# Altium PCB Color_V1.0.PcbDoc
Units mm, origin at the board's own origin, x right, y up, seen from the top; angles counter-clockwise.
Board outline 55 x 55 mm, 2 copper layers (Top Layer, Bottom Layer), stack 0.96 mm thick; 49 components, 31 nets, 199 pads, 37 vias.
Unrouted connection lines stored in the file: 65.
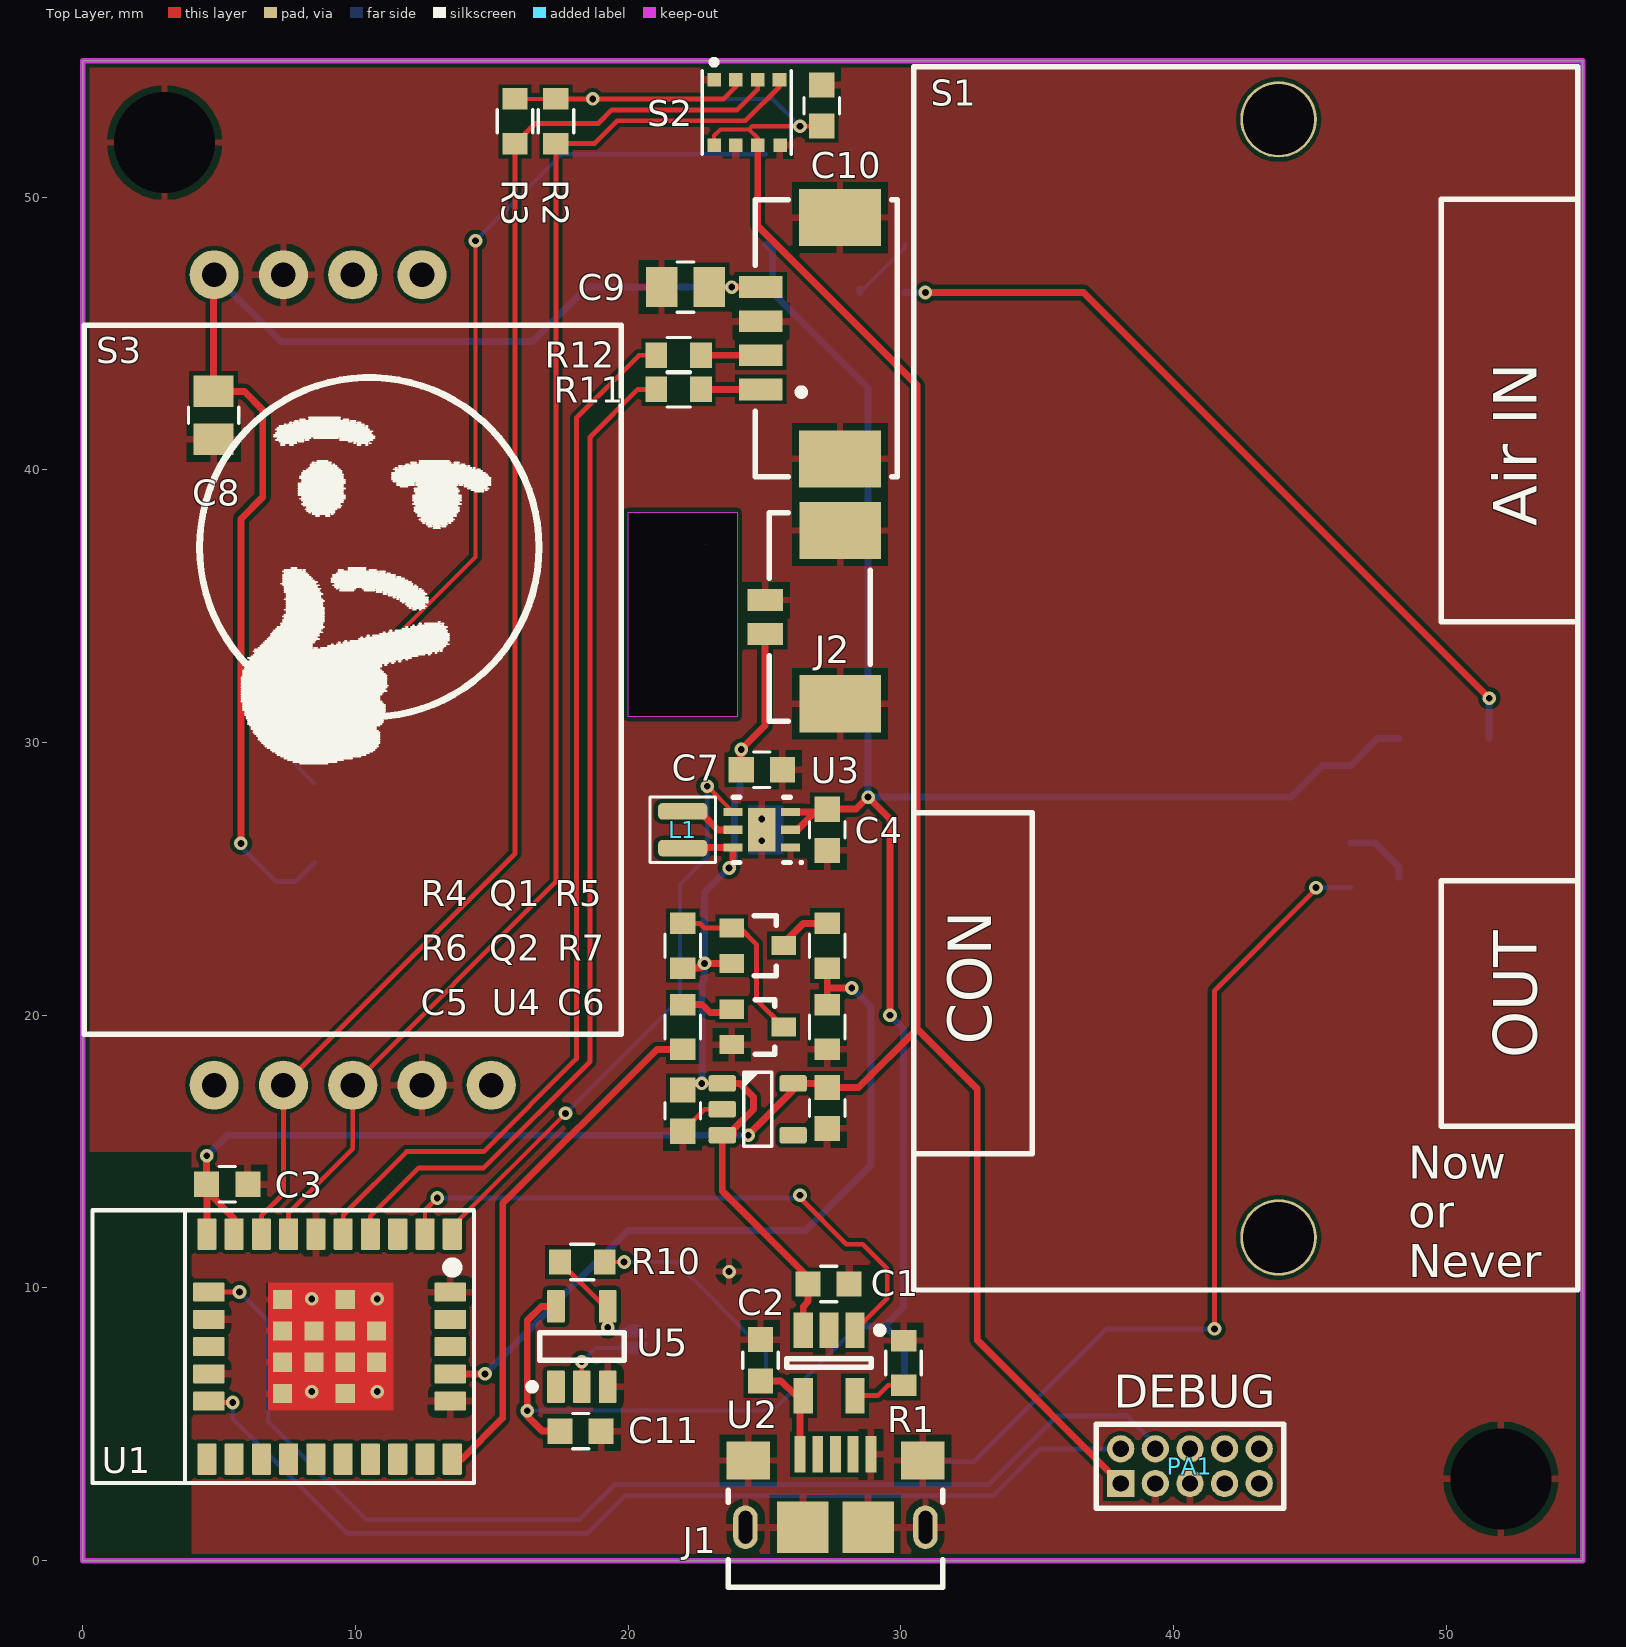
[diagram p0: Top Layer view]
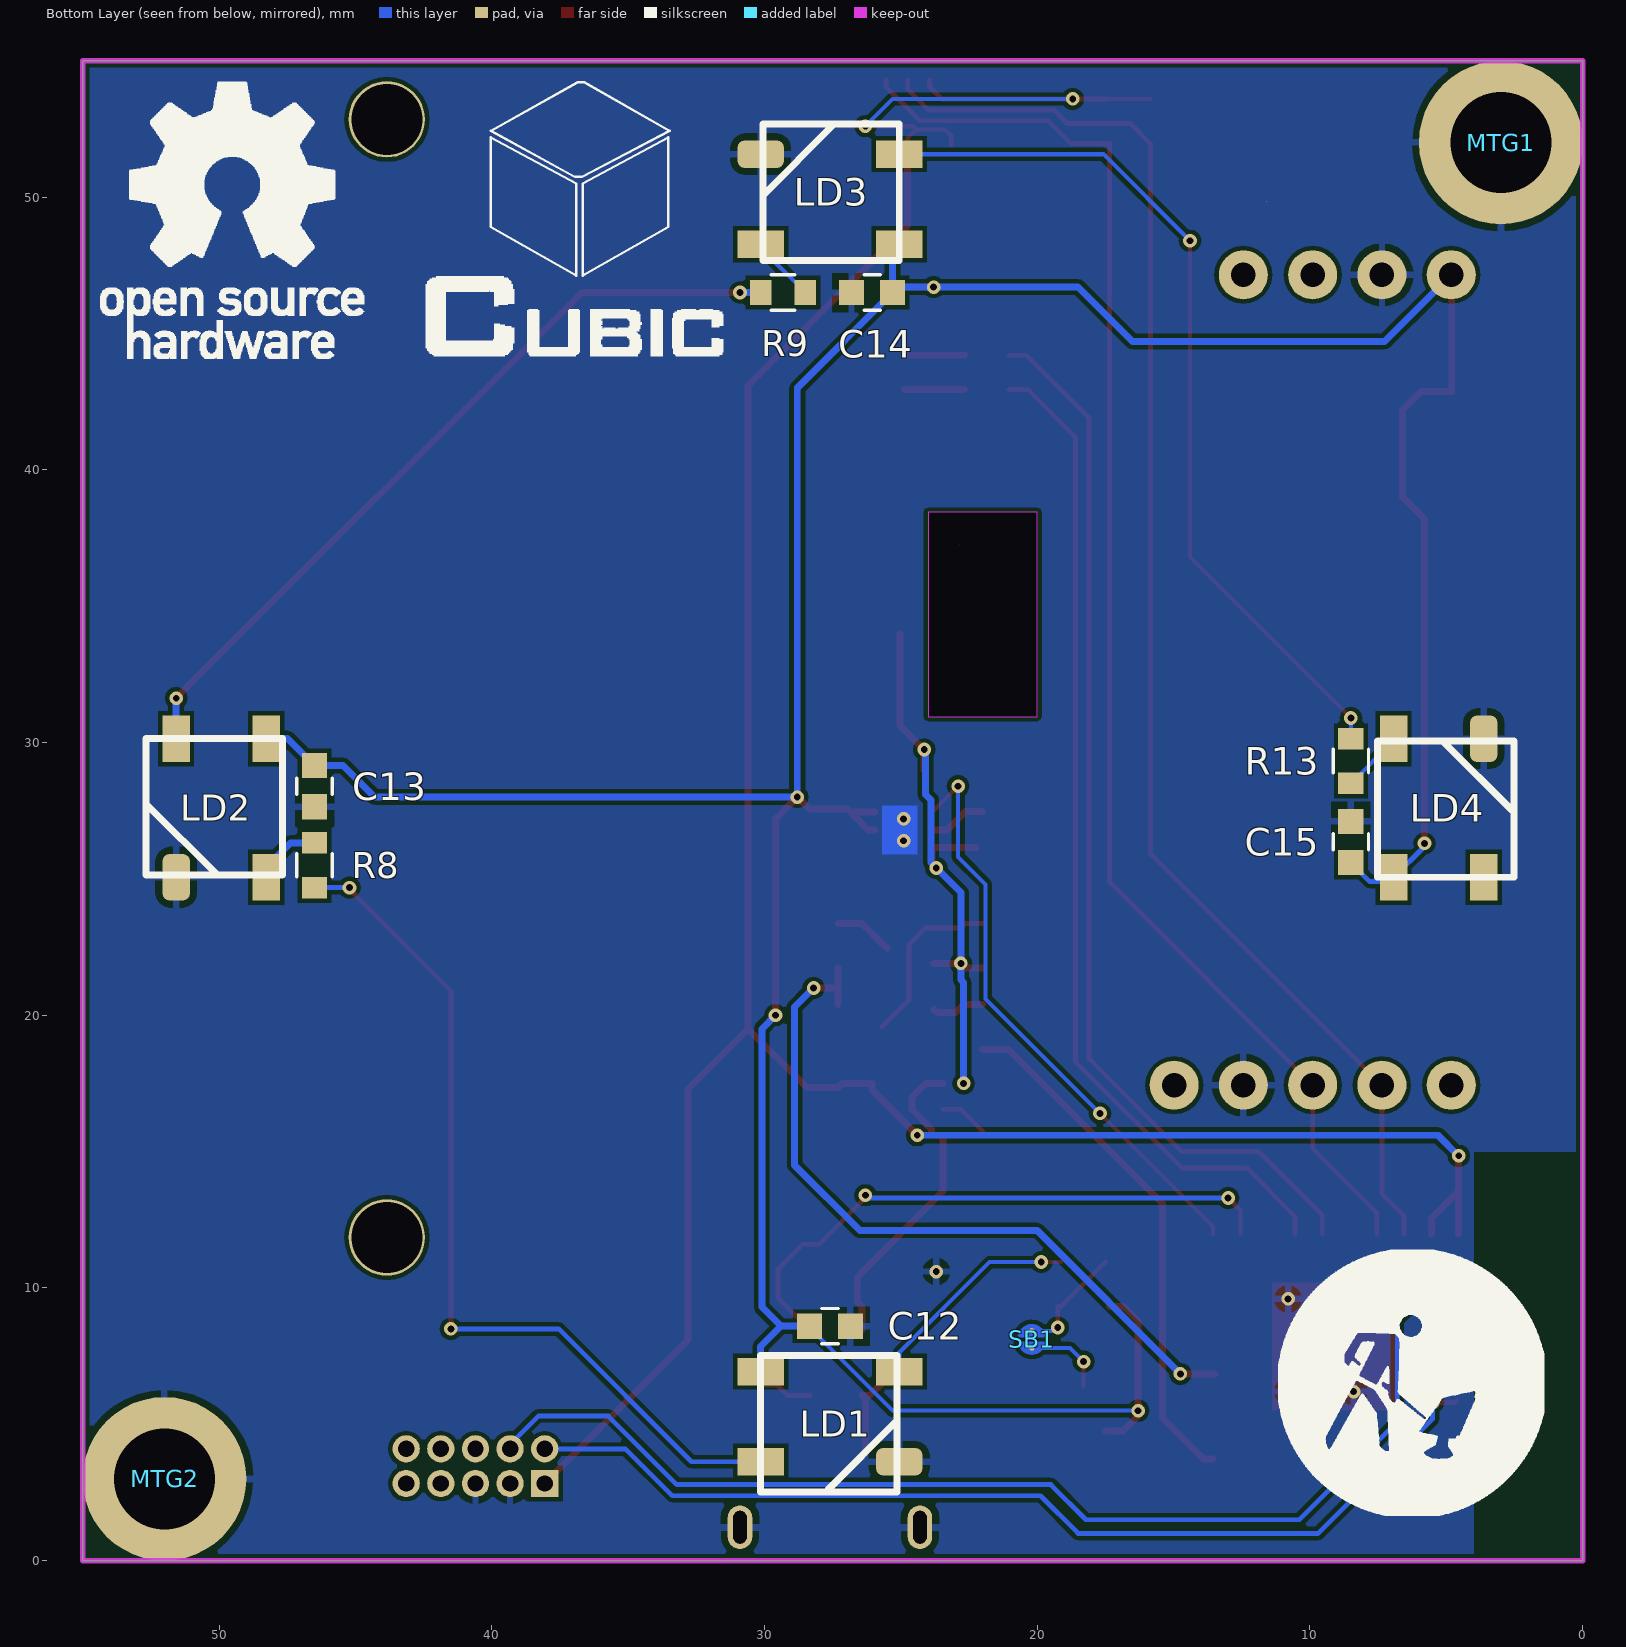
[diagram p1: Bottom Layer view, seen from below]
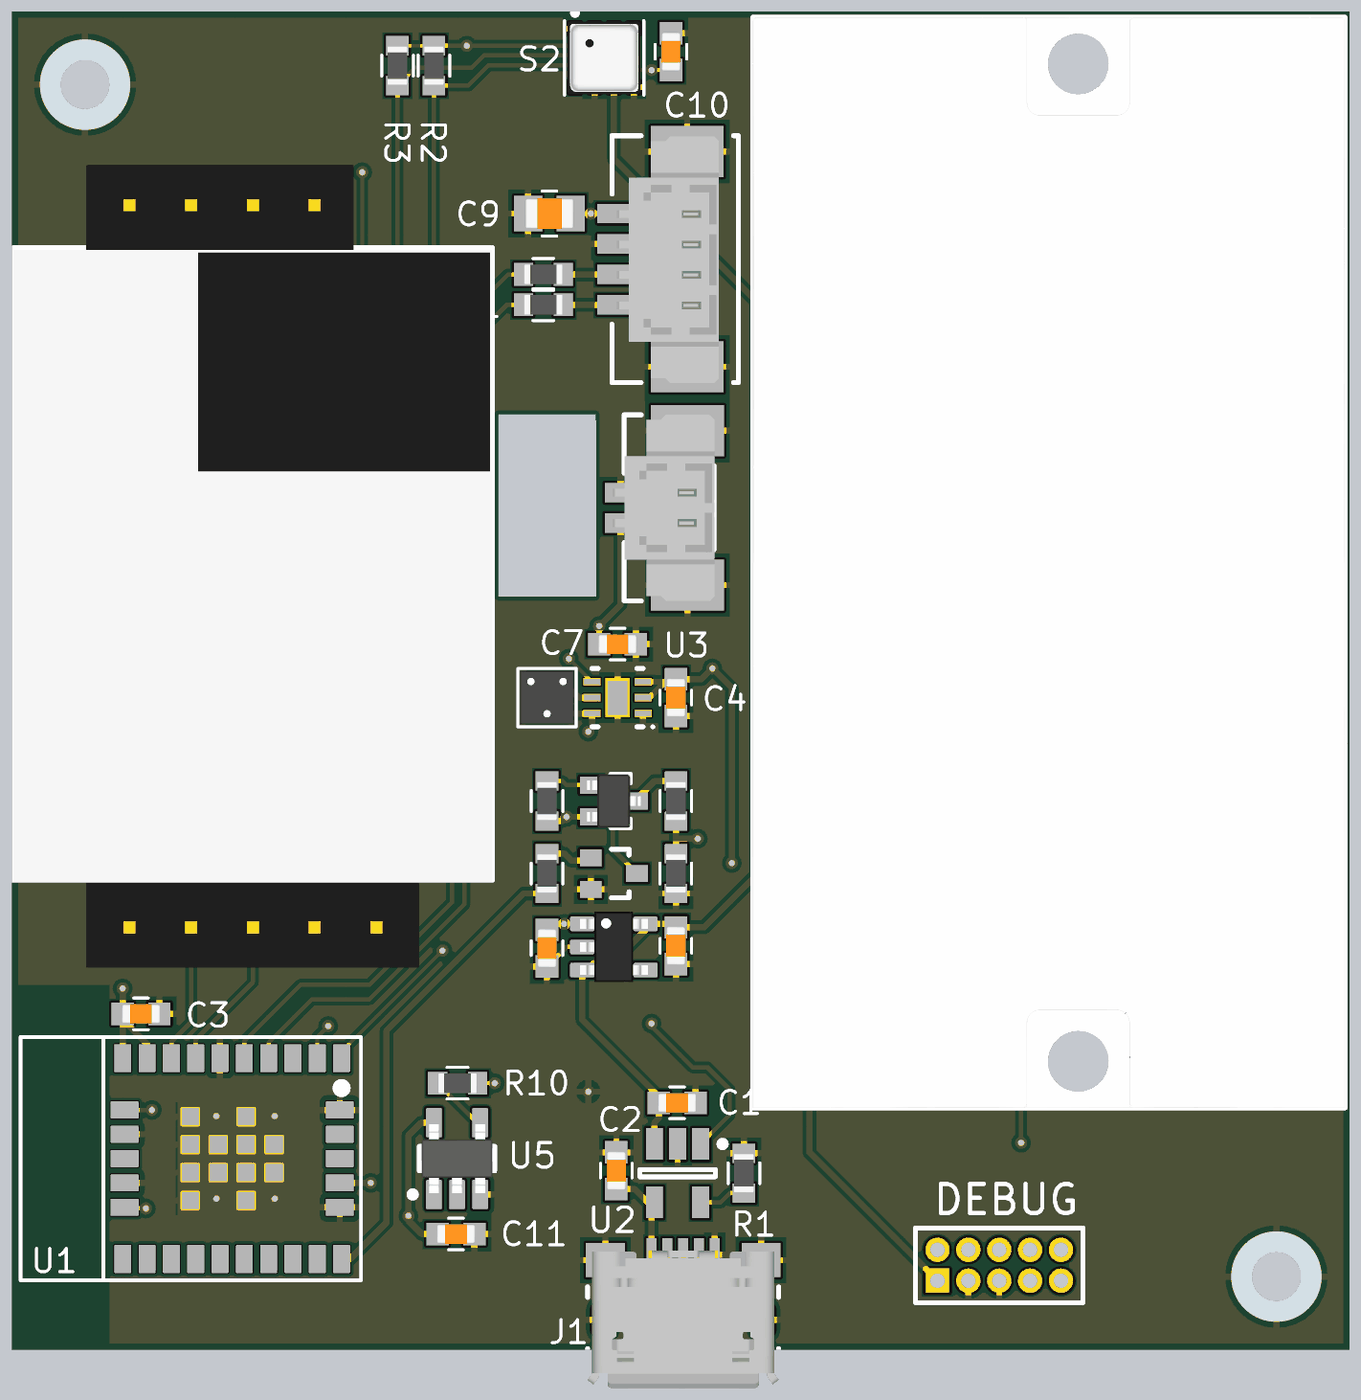
[diagram p2: 3D render of the assembled board from above, using the file's embedded part models]
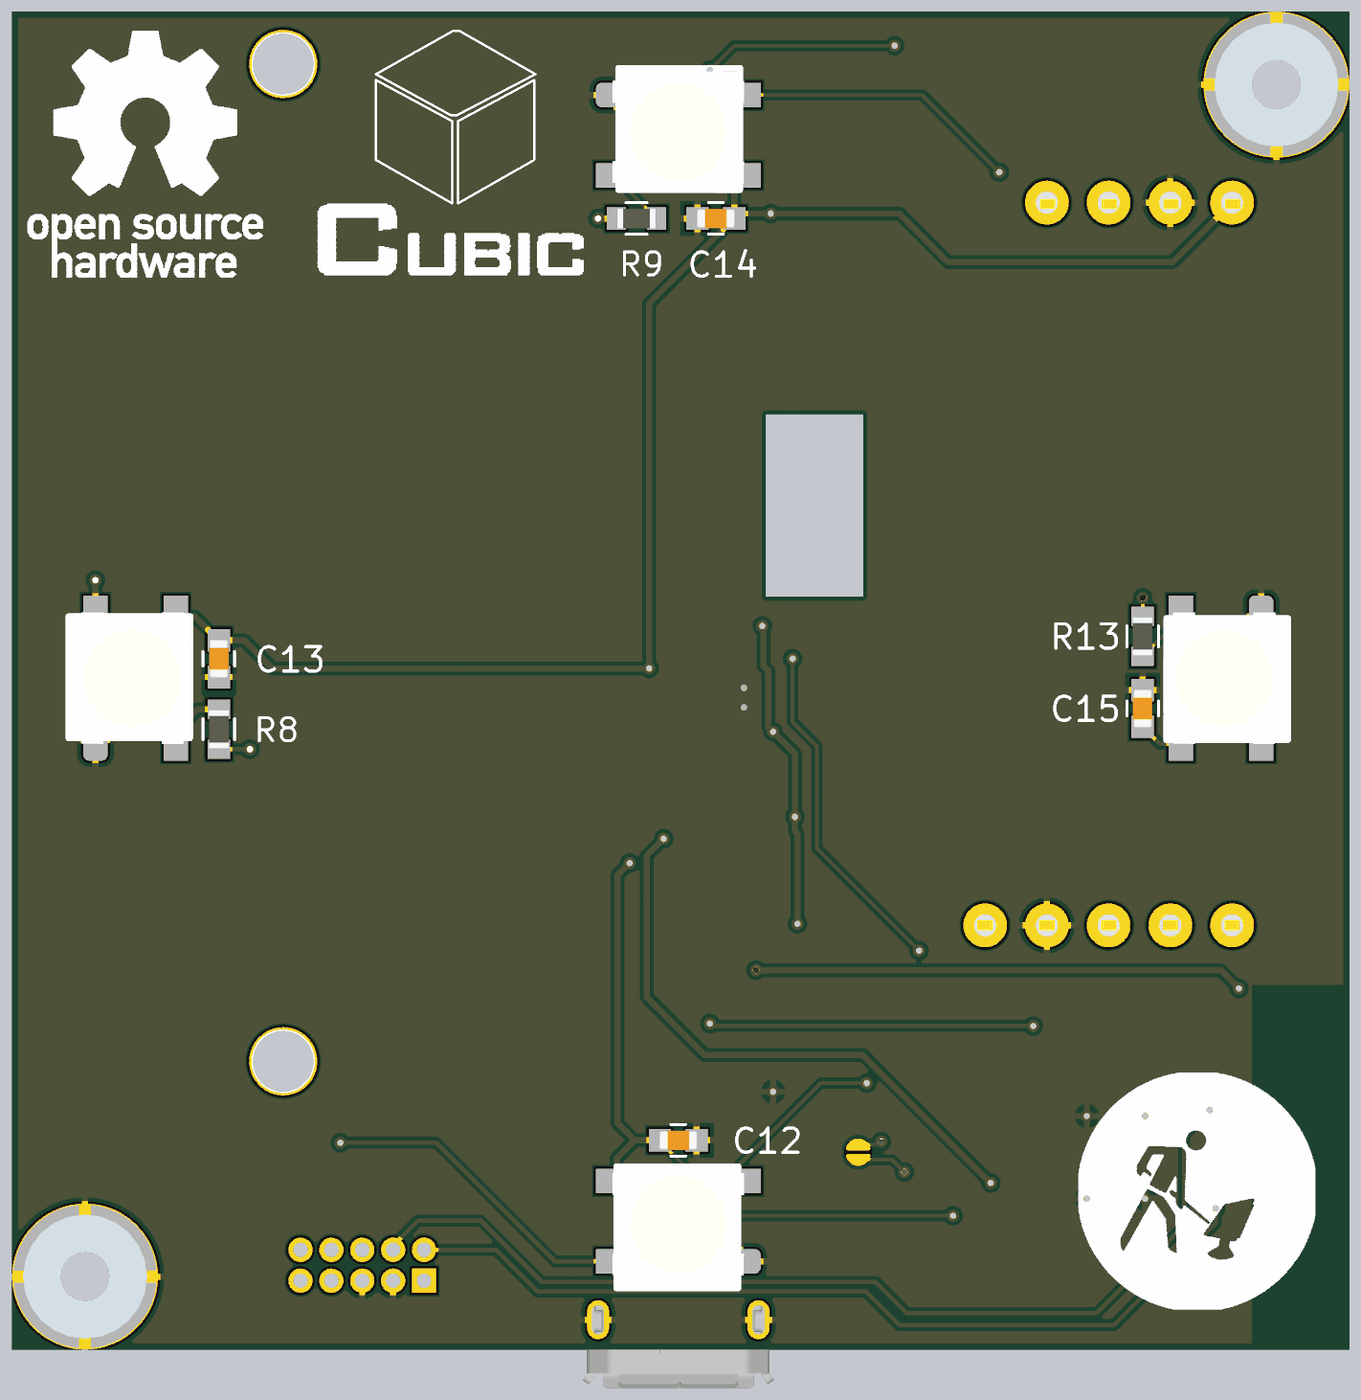
[diagram p3: 3D render of the assembled board from below, using the file's embedded part models]

## Layer stack, top to bottom
Top Solder: solder mask 0.01, Solder Resist, Dk 3.5
Top Layer: signal copper 0.03
Dielectric 1: dielectric 0.9, FR-4, Dk 4.8
Bottom Layer: signal copper 0.03
Bottom Solder: solder mask 0.1, Solder Resist, Dk 3.5

## Board outline
0,0 0,55 55,55 55,0
cut-out: 24,30.95 20,30.95 20,38.45 24,38.45
cut-out: 22.85,37.25
cut-out: 22.85,37.25
cut-out: 11.6,49.85

## Design rules (kind name [scope] priority, off if disabled: settings)
BoardOutlineClearance [All] p1: gap=0 ignorepadtopadclearanceinfootprint=FALSE
Clearance [All] p1: gap=0.152 ignorepadtopadclearanceinfootprint=FALSE
ComponentClearance [All] p1: gap=0 collisioncheckmode=3 verticalgap=0 showdistances=FALSE
DiffPairsRouting [All] p1: maxlimit=0.203 minlimit=0.203 mostfreqgap=0.203 toplayer_minwidth=0.152 toplayer_maxwidth=0.152 toplayer_prefwidth=0.152 bottomlayer_minwidth=0.152 bottomlayer_maxwidth=0.152 bottomlayer_prefwidth=0.152 maxuncoupledlength=12.7
HoleSize [All] p1: absolutevalues=TRUE maxlimit=5 minlimit=0.025 maxpercent=80.000 minpercent=20.000
HoleToHoleClearance [All] p1: gap=0.12 allowstackedmicrovias=TRUE
MinimumSolderMaskSliver [All] p1: minsoldermaskwidth=0
PolygonConnect Main [All] p1: connectstyle=Relief reliefconductorwidth=0.25 reliefentries=4 polygonreliefangle="90 Angle" airgapwidth=0.25
PolygonConnect MTG [HasFootprint('9774030151')] p2: connectstyle=Direct reliefconductorwidth=0.254 reliefentries=4 polygonreliefangle="90 Angle" airgapwidth=0.254
RoutingVias [All] p1: holewidth=0.25 width=0.5 viastyle="Through Hole" minholewidth=0.25 minwidth=0.5 maxholewidth=0.25 maxwidth=0.5
SilkToSilkClearance [All] p1: silktosilkclearance=0
SilkToSolderMaskClearance [IsPad] p1: minsilkscreentomaskgap=0 clearancetoexposedcopper=TRUE
SolderMaskExpansion [All] p1: expansion=0.102
Width [All] p1: maxlimit=0.254 minlimit=0.152 preferedwidth=0.178
23 further rules are at their usual default settings.

## Components (designator, comment, footprint, x,y, rotation, side; value= is the part's Value field where it differs from the comment)
C1 "Cap" CAPC1608X90N_2 27.35,10.143 r180 top value="6.3V 1uF"
C2 "Cap" CAPC1608X90N_2 24.85,7.35 r90 top value="10V 1uF"
C3 "Cap" CAPC1608X90N_2 5.3,13.8 r180 top value="4V 4.7uF"
C4 "Cap" CAPC1608X90N_2 27.3,26.8 r90 top value="10V 10uF"
C5 "Cap" CAPC1608X90N_2 22,16.5 r90 top value="6.3V 1uF"
C6 "Cap" CAPC1608X90N_2 27.3,16.6 r270 top value="4V 2.2uF"
C7 "Cap" CAPC1608X90N_2 24.9,29 r180 top value="6.3V 10uF"
C8 "6.3V 10uF" CAPC2012X145N 4.8,42 r90 top value=100pF
C9 "Cap" CAPC2012X145N 22.1,46.7 r0 top value="6.3V 10uF"
C10 "Cap" CAPC1608X90N_2 27.1,53.355 r90 top value="6.3V 1uF"
C11 "Cap" CAPC1608X90N_2 18.255,4.75 r0 top value=100nF
C12 "Cap" CAPC1608X90N_2 27.6,8.6 r0 bottom value=0.1uF
C13 "Cap" CAPC1608X90N_2 46.5,28.4 r90 bottom value=0.1uF
C14 "Cap" CAPC1608X90N_2 26.055,46.5 r180 bottom value=0.1uF
C15 "Cap" CAPC1608X90N_2 8.5,26.355 r270 bottom value=0.1uF
J1 "10118193-0001LF" FCI-10118193-0001LF-5_V 27.6,2.575 r0 top
J2 "53398-0271" MOLX-53398-0271_V 26.4,34.6 r90 top
L1 "EPL2010-152" EPL2010 22,26.8 r90 top value=EPL2010
LD1 "SK6812" WS2812B 27.6,5.1 r180 bottom
LD2 "SK6812" WS2812B 50.1,27.6 r270 bottom
LD3 "SK6812" WS2812B 27.6,50.1 r0 bottom
LD4 "SK6812" WS2812B 5.1,27.6 r90 bottom
MTG1 "M2.5" 9774030151 3,52 r180 bottom
MTG2 "M2.5" 9774030151 52,3 r180 bottom
PA1 "JTAG" MHDR2X5 38.06,2.83 r0 top
Q1 "DMG1013" DIOD-SOT323-3_V 24.75,22.55 r0 top
Q2 "MMBT2222" ONSC-SC-70-3-419-04_V 24.75,19.57 r0 top
R1 "Res1" RESC1608X55N_2 30.1,7.25 r270 top value=3.5K
R2 "Res1" RESC1608X55N_2 17.35,52.78 r90 top value=4K7
R3 "Res1" RESC1608X55N_2 15.85,52.78 r90 top value=4K7
R4 "Res1" RESC1608X55N_2 22,22.55 r270 top value=10K
R5 "Res1" RESC1608X55N_2 27.3,22.55 r90 top value=1M
R6 "Res1" RESC1608X55N_2 22,19.57 r90 top value=10K
R7 "Res1" RESC1608X55N_2 27.3,19.57 r90 top value=111K
R8 "Res1" RESC1608X55N_2 46.5,25.5 r270 bottom value=330
R9 "Res1" RESC1608X55N_2 29.32,46.5 r0 bottom value=330
R10 "Res1" RESC1608X55N_2 18.32,10.95 r180 top value=330
R11 "Res1" RESC1608X55N_2 21.85,42.95 r0 top value=330
R12 "Res1" RESC1608X55N_2 21.85,44.2 r0 top value=330
R13 "Res1" RESC1608X55N_2 8.5,29.32 r90 bottom value=330
S1 "PM2006" PM2006 42.643,32.35 r90 top locked
S2 "BME680" BME680 24.35,53.1 r180 top
S3 "CM1106" CM1106 9.9,31.9 r90 top
SB1 "Solderbridge" Solderbridge 20.2,8.425 r270 bottom
U1 "NINA-B112" NINA-B1 7.35,7.85 r180 top value=NINA-B1
U2 "MCP73831" SOT-23-OT5_M 27.371,7.25 r270 top
U3 "TPS61240DRVR" DRV6-1600X1000TP 24.9,26.8 r180 top
U4 "TLV741P" SOT23-5 24.75,16.55 r0 top
U5 "SN74LV1T34" DBV0005A_M 18.3,7.85 r90 top

## Footprints (in the part's own frame and the unit in brackets; to place one, negate y for a bottom-side part, rotate by r counter-clockwise, add the part's x,y. Pads: shape width x height; smd on the part's side, far side on the other; paste and mask are expansions set on the pad)
9774030151 [mm] "M2.5 Thread Internal, Length 3mm"
  round 6 / inner round 0 / far side round 0 hole 3.7 paste-403.566: 1(0,0)
  body extent -2.55,-2.55 2.55,2.55, height 3.01
BME680 [mm]
  rect 0.5x0.5 smd: 1(1.2,-1.2) 2(0.4,-1.2) 3(-0.4,-1.2) 4(-1.2,-1.2) 5(-1.22,1.2) 6(-0.4,1.2) 7(0.4,1.2) 8(1.2,1.2)
  silkscreen extent -1.63,-1.95 1.63,1.53, body extent -1.5,-1.5 1.5,1.5, height 0.95
CAPC1608X90N_2 [mm]
  rect 0.92x0.93 smd: 1(-0.755,0) 2(0.755,0)
  Top Layer pour cut-out: -0.381,-0.635 0.381,-0.635 0.381,0.635 -0.381,0.635
  silkscreen extent -0.3,-0.65 0.3,0.65, body extent -0.8,-0.4 0.8,0.4, height 0.9
CAPC2012X145N [mm]
  rect 1.16x1.47 smd: 1(-0.875,0) 2(0.875,0)
  Top Layer pour cut-out: -0.381,-0.889 0.381,-0.889 0.381,0.889 -0.381,0.889
  silkscreen extent -0.3,-0.92 0.3,0.92, body extent -1,-0.63 1,0.63, height 1.45
CM1106 [mm]
  round 1.8 hole 0.9: L1(-14.463,5.08) L2(-14.463,2.54) L3(-14.463,0) L4(-14.463,-2.54) L5(-14.463,-5.08) R1(15.25,5.08) R2(15.25,2.54) R3(15.25,0) R4(15.25,-2.54)
  silkscreen extent -12.6,-9.85 13.4,9.85, body extent -16.2,-9.85 16.8,9.85, height 18.1
DBV0005A_M [mm] "SOT23, 5-Leads, Body 3.05x1.75mm, Pitch 0.95mm, IPC Low Density"
  rrect15% 1.2x0.65 smd: 1(-1.475,0.95) 2(-1.475,0) 3(-1.475,-0.95) 4(1.475,-0.95) 5(1.475,0.95)
  silkscreen extent -1.6,-1.55 0.5,1.95, body extent -1.42,-1.46 1.42,1.46, height 1.08
DIOD-SOT323-3_V [mm] "SOT323, 3-Leads, Body 2.2x1.35mm, Pitch 0.65mm"
  rect 0.9x0.7 smd: 1(-0.95,0.65) 2(-0.95,-0.65) 3(0.95,0)
  silkscreen extent -0.13,-1.1 0.67,1.1, body extent -1.1,-1.1 1.1,1.1, height 1.07
DRV6-1600X1000TP [mm] "SON, 6-Leads, Body 2x2mm, Pitch 0.65mm, Thermal Pad 1.6x1mm, TI Recommended"
  rect 0.7x0.3 smd paste-0.025 mask+0.07: 1(-1.05,0.65) 2(-1.05,0) 3(-1.05,-0.65) 4(1.05,-0.65) 5(1.05,0) 6(1.05,0.65)
  rect 1x1.6 smd paste-0.5 mask+0.07: 7(0,0)
  silkscreen extent -1.5,-1.2 1.05,1.25, body extent -1.05,-1.05 1.05,1.05, height 0.8
EPL2010 [mm]
  rrect50% 0.6x1.8 smd: 1(-0.675,0) 2(0.675,0)
  silkscreen extent -1.2,-1.2 1.2,1.2, body extent -1.1,-1.1 1.1,1.1, height 1.05
FCI-10118193-0001LF-5_V [mm] "Micro, USB-B, 5-Leads, Body 7.86x5.05mm, Pitch 0.65 mm"
  rect 0.4x1.35 smd: 1(-1.3,1.325) 2(-0.65,1.325) 3(0,1.325) 4(0.65,1.325) 5(1.3,1.325)
  rect 1.6x1.4 smd: 6(-3.2,1.1) 7(3.2,1.1)
  rect 1.9x1.9 smd: 8(-1.2,-1.35) 9(1.2,-1.35)
  oval 0.9x1.6 hole 0.5 slot 1.2 at 90 deg: 10(-3.3,-1.35) 11(3.3,-1.35)
  silkscreen extent -3.93,-3.55 3.93,0, body extent -3.93,-4.16 3.93,1.5, height 2.83
MHDR2X5 [mm] "Connector; Header; 5x2 Position"
  rect 1x1 hole 0.6: 1(0,0)
  round 1 hole 0.6: 2(0,1.27) 3(1.27,0) 4(1.27,1.27) 5(2.54,0) 6(2.54,1.27) 7(3.81,0) 8(3.81,1.27) 9(5.08,0) 10(5.08,1.27)
  silkscreen extent -0.9,-0.9 5.98,2.17
MOLX-53398-0271_V [mm] "Header, 2-Leads, Body 7.65x3.7mm, Pitch 1.25mm"
  rect 0.8x1.3 smd: 1(-0.625,1.375) 2(0.625,1.375)
  rect 2.1x3 smd: MP1(-3.175,-1.375) MP2(3.175,-1.375)
  silkscreen extent -3.82,-2.47 3.83,1.22, body extent -3.82,-2.49 3.83,1.71, height 4.72
NINA-B1 [mm] "Stand-alone Bluetooth low energy module"
  rrect10% 0.7x1.15 smd paste+0 mask+0.05: 1(-6.2,-4.125) 2(-5.2,-4.125) 3(-4.2,-4.125) 4(-3.2,-4.125) 5(-2.2,-4.125) 6(-1.2,-4.125) 7(-0.2,-4.125) 8(0.8,-4.125) 9(1.8,-4.125) 10(2.8,-4.125) 16(2.8,4.125) 17(1.8,4.125) 18(0.8,4.125) 19(-0.2,4.125) 20(-1.2,4.125) 21(-2.2,4.125) 22(-3.2,4.125) 23(-4.2,4.125) 24(-5.2,4.125) 25(-6.2,4.125)
  rrect10% 1.15x0.7 smd paste+0 mask+0.05: 11(2.725,-2) 12(2.725,-1) 13(2.725,0) 14(2.725,1) 15(2.725,2) 26(-6.125,2) 27(-6.125,1) 28(-6.125,0) 29(-6.125,-1) 30(-6.125,-2)
  rect 0.7x0.7 smd paste+0 mask+0.05: G(-3.425,-0.575) G(-3.425,0.575) G(-2.275,1.725) G(-2.275,-0.575) G(-2.275,0.575) G(-2.275,-1.725) G(-1.125,-0.575) G(-1.125,0.575) G(0.025,1.725) G(0.025,0.575) G(0.025,-0.575) G(0.025,-1.725)
  Top Layer pour cut-out: 3.6,-5 7,-5 7,5 3.6,5
  Bottom Layer pour cut-out: 3.6,-5 7,-5 7,5 3.6,5
  silkscreen extent -7,-5 7,5, body extent -7,-5 7,5, height 4.1
ONSC-SC-70-3-419-04_V [mm] "SOT23, 3-Leads, Body 2x1.25mm, Pitch 0.65mm"
  rect 0.9x0.7 smd: 1(-0.95,0.65) 2(-0.95,-0.65) 3(0.95,0)
  silkscreen extent -0.1,-1 0.63,1, body extent -0.63,-1 0.63,1, height 1
PM2006 [mm]
  rect 0.8x1.6 smd: 1(10.6,17.775) 2(11.85,17.775) 3(13.1,17.775) 4(14.35,17.775)
  rect 2.1x3 smd: 3(8.05,14.875) 3(16.9,14.875)
  round 2.8 hole 2.6: MTG(-20.5,-1.207) MTG(20.5,-1.207)
  silkscreen extent -22.42,-12.18 22.43,17.98, body extent -22.42,-12.18 22.42,17.77, height 16.45
RESC1608X55N_2 [mm]
  rect 0.79x0.93 smd: 1(-0.82,0) 2(0.82,0)
  Top Layer pour cut-out: -0.381,-0.635 0.381,-0.635 0.381,0.635 -0.381,0.635
  silkscreen extent -0.43,-0.65 0.43,0.65, body extent -0.8,-0.4 0.8,0.4, height 0.55
Solderbridge [mm]
  round 0.2 smd paste-10: 1(0,0) 2(0.625,0)
  Top Layer region: 0.389,0.432 0.465,0.505 0.583,0.467 0.648,0.424 0.721,0.351 0.775,0.292 0.833,0.193 0.861,0.099 0.856,-0.122 0.831,-0.193 0.747,-0.33 0.663,-0.411 0.571,-0.469 0.47,-0.5 0.419,-0.483 0.389,-0.43
  Top Layer region: 0.236,-0.432 0.16,-0.505 0.042,-0.467 -0.023,-0.424 -0.097,-0.351 -0.15,-0.292 -0.208,-0.193 -0.236,-0.099 -0.231,0.122 -0.206,0.193 -0.122,0.33 -0.038,0.411 0.054,0.469 0.155,0.5 0.206,0.483 0.236,0.43
  Top Layer lines w0.152: 0.465,0.431 cw(c0.355,0) 0.625,0.353 cw(c0.355,0) 0.774,0.149 cw(c0.355,0) 0.465,-0.431 ; 0.159,0.431 ccw(c0.27,0) 0.025,0.371 ccw(c0.27,0) 0,0.353 ccw(c0.27,0) -0.175,0 ccw(c0.27,0) 0.159,-0.431
SOT23-5 [mm]
  round 0.5 on Mech15: 0(0,0)
  rrect25% 1x0.6 smd: 1(-1.3,0.95) 2(-1.3,0) 3(-1.3,-0.95) 4(1.3,-0.95) 5(1.3,0.95)
  silkscreen extent -0.51,-1.35 0.51,1.35, body extent -1.4,-1.45 1.4,1.45, height 1.44
SOT-23-OT5_M [mm] "SOT23, 5-Leads, Body 2.9x1.7mm, Pitch 0.95mm, Lead Span 2.8mm, IPC Low Density"
  rect 1.3x0.7 smd: 1(-1.2,0.95) 2(-1.2,0) 3(-1.2,-0.95) 4(1.2,-0.95) 5(1.2,0.95)
  silkscreen extent -1.32,-1.55 0.15,1.98, body extent -0.9,-1.55 0.9,1.55, height 1.45
WS2812B [mm]
  rrect50% 1.7x1 smd: 1(2.54,-1.473)
  rect 1.7x1 smd: 2(2.54,1.829) 3(-2.54,1.829) 4(-2.54,-1.473)
  silkscreen extent -2.54,-2.58 2.46,2.42, body extent -2.7,-2.45 2.7,2.55, height 1.5

## Part data
C1 C2 C3 C4 C5 C6 C7 C9 C10 C11 C12 C13 C14 C15: "Capacitor", LatestRevisionDate=17-Jul-2002, LatestRevisionNote="Re-released for DXP Platform.", PackageDescription="Radial Cap, Thru-Hole; 2 Leads; 0.3 in Pin Spacing", PackageReference=RAD-0.3, Published=8-Jun-2000, Publisher="Altium Limited"
C8: library part Cap, "Capacitor", LatestRevisionDate=17-Jul-2002, LatestRevisionNote="Re-released for DXP Platform.", PackageDescription="Radial Cap, Thru-Hole; 2 Leads; 0.3 in Pin Spacing", PackageReference=RAD-0.3, Published=8-Jun-2000, Publisher="Altium Limited"
J1: library part CMP-2000-05119-1, "Micro USB B Type Receptacle, -55 to 85 degC, 5-Pin SMD, RoHS, Tape and Reel", Color=Black, Current Rating=1.8A, Flammability Rating=UL94V-0, Insulation Resistance=1000MOhms, Manufacturer=FCI, Operating Temperature Range=-55Cto+85C, Brand=FCI, Connector Type=MicroUSBTypeBreceptacle, Contact Material=CopperAlloy, Contact Plating=Gold, Datasheet URL=http://datasheet.octopart.com/10118193-0001LF-FCI-datasheet-55953155.pdf, Datasheet Version="Rev. C, 05/2015", Factory Pack Quantity=1200, Gender=Female, Manufacturer URL=http://www.fci.com/, Mounting Angle=Right, Number of Contacts=5Contact, Packaging=Reel, Product=MicroUSBTypeBConnectors, Product Category=USBConnectors, RoHS=Details, Standard=USB2.0, Termination Style=SMD/SMT
J2: library part CMP-2000-07600-1, "Male Header, Pitch 1.25 mm, 1 x 2 Position, Height 4.7 mm, -40 to 85 degC, RoHS, Tape and Reel", Colour=Natural, Contact Resistance=20mOhm, Current Rating=1A, Flammability Rating=UL94V-0, Insulation Resistance=100MOhm, Manufacturer=Molex, Max Operating Temperature=85degC, Min Operating Temperature=-40degC, Package Description="Male Header, Pitch 1.25 mm, 1 x 2 Position, Height 4.7 mm", Package Quantity=1000, Voltage Rating=125V, Contact Material=Tin, Contact Plating=Tin, Datasheet URL=http://www.molex.com/pdm_docs/sd/533980271_sd.pdf, Datasheet Version="Rev. J, 09/2015", Gender=Male, Glow Wire Compliant=Non-compliant, Housing Colour=Natural, Housing Material=Nylon, Lead Free=LeadFree, Manufacturer URL=http://www.molex.com/, Mount=SurfaceMount, Mounting Technology=SurfaceMount, Number of Circuits=2, Number of Contacts=2, Number of Positions=2, Number of Rows=1, Orientation=Vertical, Package Reference=53398-0271, Packaging=TapeandReel, Pitch=1.25mm, Radiation Hardening=No, REACH SVHC=Unknown, RoHSCompliant=True, Termination=Solder, Voltage Rating (AC)=125V, Voltage Rating (DC)=125V, Working Voltage=125V
L1: library part Inductor, "Inductor", Code_IEC=1005, Code_JEITA=0402, LatestRevisionDate=29-May-2009, LatestRevisionNote="IPC-7351 Footprint Added.", PackageDescription="Chip Inductor", PackageReference=0402-A, Published=8-Jun-2000, Publisher="Altium Limited"
MTG1 MTG2: library part 9774030151R, "WA-SMSI SMT Steel Spacer, M2.5 Thread Internal, Length 3mm", ComponentLink1Description=Manufacturer, ComponentLink1URL=http://www.we-online.de, ComponentLink2Description=Datasheet, ComponentLink2URL=http://katalog.we-online.de/em/datasheet/9774030151R.pdf, InnerDiameter=3.5mm, Length=3mm, OuterDiameter=5.1mm, Packaging="Tape and Reel", PartNumber=9774030151R, PublishedDate="Dec. 2016", Publisher="Wurth Elektronik", Thread=M2.5
PA1: library part MHDR2X5, "Header, 5-Pin, Dual row", LatestRevisionDate=17-Jul-2002, LatestRevisionNote="Re-released for DXP Platform.", Publisher="Altium Limited"
Q1: library part CMP-2000-06170-1, "P-Channel Enhancement Mode MOSFET, 310 mW, 20 V, -55 to 150 degC, 3-Pin SOT-323, RoHS, Tape and Reel", Drain-Source On Resistance-Max=750mO, Drain-to-Source Voltage [Vdss]=20V, Manufacturer="Diodes Inc", Package Description="3-Pin Small Outline Transistor, Body 2 x 1.25 mm, Pitch 0.65 mm", Package Reference=SOT323, Rated Power Dissipation=310mW, Channel Type=P-Channel, Datasheet URL=http://www.diodes.com/_files/datasheets/ds31861.pdf, Datasheet Version="Rev. 3-2, 09/2013", Manufacturer URL=http://www.diodes.com/, Mounting Technology=SurfaceMount, Qg Gate Charge=0.622nC
Q2: library part CMP-1048-00382-1, "General Purpose Transistor, NPN Silicon, 3-Pin SC70, Pb-Free, Tape and Reel", Manufacturer="On Semiconductor", PartNumber=MMBT2222AWT1G, ComponentLink1Description="Manufacturer URL", ComponentLink1URL=http://www.onsemi.com/, ComponentLink2Description=Datasheet, ComponentLink2URL=http://www.onsemi.cn/pub_link/Collateral/MMBT2222AWT1-D.PDF, ComponentLink3Description="Package Specification", ComponentLink3URL=http://www.onsemi.cn/pub_link/Collateral/419-04.PDF, DatasheetVersion="Rev. 6", fT Min (MHz)=300, IC Continuous (A)=0.6, Mounting Technology="Surface Mount", PackageDescription="3-Pin Small Outline Transistor, Body 2 x 1.25 mm, Pitch 0.65 mm", PackageReference=SC-70-3-419-04, PackageVersion="Rev. N, 11/2008", Packing="Tape and Reel", Polarity=NPN, RoHS=TRUE
R1 R2 R3 R4 R5 R6 R7 R8 R9 R10 R11 R12 R13: "Resistor", LatestRevisionDate=17-Jul-2002, LatestRevisionNote="Re-released for DXP Platform.", PackageDescription="Axial Device, Thru-Hole; 2 Leads; 0.3 in Pin Spacing", PackageReference=AXIAL-0.3, Published=8-Jun-2000, Publisher="Altium Limited"
S2: "Integrated Environmental Unit", Package="LGA-8 Bosch Tools", Availability=Good, MF=Bosch, MP=BME680, Price="9.29 USD", SnapEDA_Link=https://www.snapeda.com/symbols-footprints/BME680/Bosch%20Sensortec/view-part/?ref=snap
S3: "MINI INFRARED CO2 MODULE CM1106 SERIES SINGLE BEAM"
U1: library part NINA-B1, "Stand-alone Bluetooth low energy module", Manufacturer=u-blox, Part Description="Stand-alone Bluetooth low energy module"
U2: library part CMP-0133-00143-1, "Miniature Single-Cell, Fully Integrated Li-Ion, Li-Polymer Charge Management Controller, 4.2V, 5-Pin SOT-23, Industrial Temperature, Tape and Reel", Code_IPC=SOT23-5, DatasheetVersion="revE, Sep-2008", PackageDescription="5-Lead Plastic Small Outline Transistor (OT) [SOT-23]", PackageReference=SOT-23-OT5, PackageVersion="revBB, Aug-2009"
U3: library part CMP-0347-00037-1, "Boost Voltage Converter with 2.3 to 5.5 V Input and 5 V Output, 6-Pin SON (DRV), Green (RoHS & no Sb/Br)", Manufacturer="Texas Instruments", Switching Frequency(Max)(kHz)=4000, ComponentLink1Description=Datasheet, ComponentLink1URL=http://www.ti.com/general/docs/lit/getliterature.tsp?genericPartNumber=TPS61240&fileType=pdf, ComponentLink2Description="Package Specification", ComponentLink2URL=http://www.ti.com/litv/pdf/mpds216d, DatasheetVersion=SLVS806B, Eco-Plan="Green (RoHS & no Sb/Br)", Mounting Technology="Surface Mount", PackageDescription="6-Pin Plastic Small Outline No-Lead, 2 x 2 x 0.8 mm Body, 0.65 mm Pitch, Exposed Pad", PackageReference=DRV6-1600X1000TP, PackageVersion="revE, Oct-2010", PartNumber=TPS61240DRVR, Preset Vout(V)=5, Regulated Outputs(#)=1, SubFamily="Step-Up Regulator", Synchronous Rectification=TRUE, Topology=Boost, Vin(Max)(V)=5.5, Vin(Min)(V)=2.3, Vout(Max)(V)=5, Vout(Min)(V)=5
U4: library part TLV741, "Low-Dropout Regulator With Foldback Current Limit for Portable / Devices"
U5: library part CMP-0859-00123-3, "Single Power Supply BUFFER Logic Level Shifter (no enable), DBV0005A, LARGE T&R", F @ Nom Voltage(Max)(Mhz)=50, ICC @ Nom Voltage(Max)(mA)=0.01, Manufacturer="Texas Instruments", Operating Temperature Range(C)="-40 to 125", Rating=Catalog, tpd @ Nom Voltage(Max)(ns)=14.5,9.5,8.0,6.5, Voltage(Nom)(V)=1.8,2.5,3.3,5.5, 3-State Output=Yes, Bits(#)=1, DatasheetVersion=SCLS743A, Generic Part Number=SN74LV1T34, Input Type=TTL, Logic=True, Output Drive (IOL/IOH)(Max)(mA)=8/-8, Output Type=CMOS, PackageReference=DBV0005A, Schmitt Trigger=No, Special Features="1.8V to 3.3V Up Translation,3.3V to 1.8V Down Translation,5V Input Tolerant", Sub-Family="Non-Inverting Buffer/Driver", Technology Family=LV1T, VCC(Max)(V)=5.5, VCC(Min)(V)=1.6
SB1: Artikkelnr Noca=N.A., Artikkelnr Simpro=N.A., Footprint Doc=Solderbridge, LatestRevisionDate=2009-12-14, Part Number=Solderbridge, Pin Count=2, Published=2009-12-14, Publisher="Nordic Semiconductor"

## Via types
v1: diameter 0.5, hole 0.25, Top Layer to Bottom Layer, tented both sides, 37 vias

## Nets (pads, with @x,y where several pads share a name; then routed paths per layer and width w, separated by ;. In a path a pad name is that pad's centre, name@x,y a point inside that pad or via, vN(x,y) a via of type N, cw(c..) or ccw(c..) an arc to the next point about the centre after c; other vN are vias at no path point)
3V3: C3.2 C6.1 C10.1 PA1.1 R2.2 R3.2 S2.2 S2.6 S2.8 U1.9 U1.10 U4.5 | length 109.3
  Top Layer w0.152: R3.2 R2.2 ; S2.8 23.15,52.25 23.383,52.483 24.417,52.483 24.432,52.468 ; S2.6 24.75,52.164 24.432,52.483 24.549,52.6 C10.1
  Top Layer w0.178: R2.2 v1(18.7,53.6) 23.5,53.6 23.95,54.05 S2.2
  Top Layer w0.254: v1(4.545,14.845) C3.2 4.55,13.795 C3.2@4.55,13.55 ; U1.10 C3.2@4.55,13.55 ; U1.9 5.55,12.55 C3.2@4.55,13.55 ; v1(24.4,15.6) 26.05,17.25 U4.5 27.155,17.5 C6.1 28.455,17.355 ; S2.6 24.75,48.95 30.6,43.1 30.6,19.5 ; 28.5,17.4 30.6,19.5 ; PA1.1 32.8,8.09 32.8,17.3 30.6,19.5
  Bottom Layer w0.152: v1(18.7,53.6) 25.3,53.6 v1(26.3,52.6)
  Bottom Layer w0.254: v1(4.545,14.845) 5.3,15.6 v1(24.4,15.6)
5V: C4.2 C8.2 C9.2 C11.1 C12.2 C13.2 C14.2 C15.2 LD1.3 LD2.3 LD3.3 LD4.3 S1.4 S3.R1 U3.2 U3.3 U5.5 | length 138.8
  Top Layer w0.254: S3.R1 4.8,47.13 C8.2 5.925,42.875 6.6,42.2 6.6,39 5.8,38.2 v1(5.8,26.3) ; U5.5 16.825,9.325 16.3,8.8 v1(16.3,5.5) 16.3,5.3 16.85,4.75 C11.1 ; v1(23.8,46.7) S1.4 ; U3.2 26.2,26.8 26.85,27.45 U3.3 ; C4.2@26.955,27.555 C4.2 28.355,27.555 v1(28.8,28) 29.6,27.2 v1(29.6,20)
  Bottom Layer w0.152: v1(16.3,5.5) 25.304,5.5 28.355,8.551 C12.2
  Bottom Layer w0.178: v1(5.8,26.3) 5.8,26.189 LD4.3 7.089,24.9 7.8,24.9 C15.2
  Bottom Layer w0.254: S3.R1 7.27,44.7 16.5,44.7 18.5,46.7 v1(23.8,46.7) 25.1,46.7 C14.2 ; LD3.3 25.3,48.031 C14.2 ; C12.2 29.4,8.6 ; v1(29.6,20) 30.1,19.5 30.1,9.3 29.4,8.6 ; LD1.3 30.14,7.86 29.4,8.6 ; LD2.3 47.485,30.14 C13.2 45.455,29.155 44.3,28 v1(28.8,28) 28.8,43 C14.2
5V_EN: U1.1 U3.4 | length 21.6
  Top Layer w0.152: U1.1 13.55,12.25 v1(17.7,16.4) ; v1(22.9,28.4) U3.4
  Bottom Layer w0.152: v1(17.7,16.4) 21.9,20.6 21.9,24.8 22.9,25.8 v1(22.9,28.4)
B-E: R6.1 U1.25 | length 19.3
  Top Layer w0.254: U1.25 13.9,3.725 15.4,5.225 15.4,13.1 21.05,18.75 R6.1
BAT: R5.1 R7.2 U1.27 | length 27.6
  Top Layer w0.254: U1.27 v1(14.75,6.85) ; R7.2 27.3,21 ; R5.1 27.3,21 ; v1(28.2,21) 27.3,21
  Bottom Layer w0.254: v1(14.75,6.85) 20,12.1 26.5,12.1 28.9,14.5 28.9,20.3 v1(28.2,21)
GND: C1.1 C2.2 C3.1 C4.1 C5.1 C6.2 C7.1 C8.1 C9.1 C10.2 C11.2 C12.1 C13.1 C14.1 C15.1 J1.5 J1.6 J1.7 J1.8 J1.9 J1.10 J1.11 J2.2 J2.MP1 J2.MP2 LD1.1 LD2.1 LD3.1 LD4.1 MTG1.1 MTG2.1 PA1.3 PA1.5 Q2.2 R1.1 R7.1 S1.3 S2.1 S2.5 S2.7 S3.L4 S3.R2 U1.6 U1.12 U1.14 U1.26 U1.30 U1.G U2.2 U3.1 U3.7 U4.2 U5.3 | length 1.8
  Top Layer w0.178: C5.1 22.805,16.55 U4.2
  other v1: 8.4,6.2 10.8,6.2 8.4,9.6 10.8,9.6 23.7,10.6 24.9,26.4 24.9,27.2
LDA: LD3.4 R13.2 | length 32.7
  Top Layer w0.152: v1(8.5,30.9) 14.4,36.8 v1(14.4,48.4)
  Bottom Layer w0.152: R13.2 v1(8.5,30.9) ; v1(14.4,48.4) 17.573,51.573 LD3.4
LED: SB1.2 U5.2 | length 3
  Top Layer w0.152: U5.2 v1(18.3,7.3)
  Bottom Layer w0.152: v1(18.3,7.3) 18.8,7.8 19.847,7.8 SB1.2
NetL1_2: L1.2 U3.5 | length 2.1
  Top Layer w0.254: L1.2 22.625,27.475 23.3,26.8 U3.5
NetLD1_2: LD1.2 R10.1 | length 8
  Top Layer w0.152: R10.1 v1(19.85,10.95)
  Bottom Layer w0.152: v1(19.85,10.95) 21.75,10.95 25.06,7.64 LD1.2
NetLD1_4: LD1.4 R8.2 | length 32.3
  Top Layer w0.178: v1(41.5,8.5) 41.5,20.9 v1@45.2,24.6
  Bottom Layer w0.178: LD1.4 32.677,3.627 37.55,8.5 v1(41.5,8.5) ; v1(45.22,24.68) R8.2
NetLD2_2: LD2.2 R8.1 | length 2.5
  Bottom Layer w0.254: R8.1 47.38,26.32 48.271,25.429 LD2.2
NetLD2_4: LD2.4 R9.2 | length 29.1
  Top Layer w0.254: v1(30.9,46.5) 36.7,46.5 v1(51.573,31.627)
  Bottom Layer w0.254: R9.2 v1(30.9,46.5) ; LD2.4 v1(51.573,31.627)
NetLD3_2: LD3.2 R9.1 | length 2.6
  Bottom Layer w0.152: R9.1 30.14,48.14 LD3.2
  Bottom Layer w0.254: R9.1 R9.1@28.5,46.631
NetLD4_2: LD4.2 R13.1 | length 2.3
  Bottom Layer w0.152: LD4.2 6.929,30.071 R13.1
NetQ1_1: Q1.1 Q2.3 R4.1 | length 6.5
  Top Layer w0.178: R4.1 22.63,23.37 22.8,23.2 Q1.1 24.1,23.2 24.7,22.6 24.7,20.57 Q2.3
NetQ1_3: Q1.3 R5.2 | length 2.2
  Top Layer w0.254: Q1.3@25.5,22.45 26.42,23.37 R5.2
NetQ2_1: Q2.1 R6.2 | length 2
  Top Layer w0.254: R6.2 22.71,20.39 23,20.1 23.68,20.1 Q2.1
NetR1_2: R1.2 U2.5 | length 1.9
  Top Layer w0.178: U2.5 29.15,6.05 29.53,6.43 R1.2
NetR10_2: R10.2 SB1.1 U5.4 | length 4.2
  Top Layer w0.152: v1(19.25,8.55) U5.4
  Top Layer w0.178: R10.2 19.125,9.325 U5.4
  Bottom Layer w0.152: v1(19.25,8.55) 19.375,8.425 19.847,8.425 SB1.1
NetR11_2: R11.2 S1.1 | length 2.2
  Top Layer w0.254: R11.2 S1.1
NetR12_2: R12.2 S1.2 | length 2.2
  Top Layer w0.254: R12.2 S1.2
PM-Rx: R12.1 U1.5 | length 39
  Top Layer w0.178: U1.5 9.55,12.675 11.875,15 14.7,15 18.1,18.4 18.1,41.9 20.4,44.2 R12.1
PM-Tx: R11.1 U1.4 | length 37.1
  Top Layer w0.178: U1.4 10.55,12.625 12.325,14.4 14.7,14.4 18.6,18.3 18.6,41.2 20.35,42.95 R11.1
SCL: R2.1 S2.4 S3.L3 U1.7 | length 53.4
  Top Layer w0.178: U1.7 7.55,12.75 9.9,15.1 S3.L3 17.35,24.887 R2.1 18.76,51.96 19.6,52.8 24.3,52.8 25.55,54.05 S2.4
SDA: R3.1 S2.3 S3.L2 U1.8 | length 53.9
  Top Layer w0.178: U1.8 6.55,12.65 7.36,13.46 S3.L2 15.85,25.927 R3.1 16.59,52.7 18.9,52.7 19.4,53.2 24,53.2 24.75,53.95 S2.3
STAT: U1.2 U2.1 | length 21.9
  Top Layer w0.152: U1.2 12.55,12.85
  Top Layer w0.178: 12.55,12.85 v1(13,13.3) ; v1(26.3,13.4) 26.3,13.3 28,11.6 28.6,11.6 29.5,10.7 29.5,9.629 U2.1
  Bottom Layer w0.178: v1(13,13.3) v1@26.3,13.3
SWDCLK: PA1.4 U1.11 | length 42.5
  Top Layer w0.178: U1.11 v1(5.75,9.85)
  Bottom Layer w0.178: v1(5.75,9.85) 6.8,8.8 6.8,5.1 10.4,1.5 18.213,1.5 19.5,2.787 33.213,2.787 35.725,5.3 38.3,5.3 39.33,4.27 PA1.4
SWDIO: PA1.2 U1.15 | length 37.1
  Top Layer w0.178: U1.15 4.675,5.8 v1(5.5,5.8)
  Bottom Layer w0.178: v1(5.5,5.8) 5.5,5.2 9.7,1 18.5,1 19.881,2.381 33.381,2.381 35.1,4.1 PA1.2
VBAT: C1.2 C5.2 C7.2 J2.1 L1.1 Q1.2 R4.2 U2.3 U3.6 U4.1 U4.3 | length 34.5
  Top Layer w0.254: R4.2 22.63,21.73 v1(22.8,21.9) Q1.2 ; L1.1@22.25,26.15 U3.6 23.85,25.55 v1(23.7,25.4) ; U4.1 24.1,17.5 24.6,17 24.6,16.549 23.871,15.819 23.871,15.6 U4.3 23.45,13.55 26.595,10.405 C1.2 26.6,10.138 26.6,9.5 26.421,9.321 U2.3 ; C7.2 v1(24.145,29.745) 25.025,30.625 J2.1
  Bottom Layer w0.254: v1(22.7,17.5) 22.7,21.2 22.8,21.3 v1(22.8,21.9) 22.8,24.5 v1(23.7,25.4) 23.9,25.6 23.9,27.9 24.1,28.1 v1@24.1,29.745
VUSB: C2.1 J1.1 U2.4 | length 4
  Top Layer w0.254: C2.1 25.605,6.595 26.15,6.05 U2.4 26.3,5.929 J1.1@26.3,3.925
pads on no net: J1.2 J1.3 J1.4 LD4.4 PA1.6 PA1.7 PA1.8 PA1.9 PA1.10 S1.MTG S3.L1 S3.L5 S3.R3 S3.R4 U1.3 U1.13 U1.16 U1.17 U1.18 U1.19 U1.20 U1.21 U1.22 U1.23 U1.24 U1.28 U1.29 U4.0 U4.4 U5.1

## Polygon pours and split planes (outlines as drawn)
GND on Bottom Layer "GND_L02_P000" (solid, pour order 0): 0,0 0,55 55,55 55,0
GND on Top Layer "GND_L01_P004" (solid, pour order 4): 0,0 0,55 55,55 55,0

## Keep-outs
Keep-Out Layer:
  the board outline again, w0.2

## Other copper
Top Layer:
  rectangle net GND: 6.8,5.5 11.4,10.2
  pour cut-out: 0,0 4,0 4,15 0,15
Bottom Layer:
  rectangle net GND: 24.385,25.9 25.7,27.685
  pour cut-out: 0,0 4,0 4,15 0,15

## Silkscreen, mask and mechanical layers (free items; w line width, h text height)
Top Overlay:
  drawing of 334 lines, arcs and shapes, not listed
  text "Now / or / Never" at 48.6,10.4 h1.2
  text "DEBUG" at 37.8,5.6 h1.2
  text "Mech 7 : PCB Cutout" at 0,-5 h1.2
Bottom Overlay:
  drawing of 3453 lines, arcs and shapes, not listed
Mechanical 13:
  lines w0.1: 0.1,5.1 0.1,45.1
  lines w0.12: 55,0 55.1,0
  lines w0.2: 55.1,0 55.1,55.1 0.1,55.1 0.1,0.1 55.1,0.068

## Text inside footprints (layer, text, board x,y; h text height)
S1: Top Overlay "CON" at 33.32,18.925 h1.6 r90; Top Overlay "OUT" at 53.32,18.425 h1.6 r90; Top Overlay "Air IN" at 53.32,37.925 h1.6 r90